# Altium PCB MC5317.PcbDoc
Units mil, origin at the board's own origin, x right, y up, seen from the top; angles counter-clockwise.
Board outline 1095 x 320 mil, 2 copper layers (Top Layer, Bottom Layer); 5 components, 3 nets, 17 pads, 2 vias.
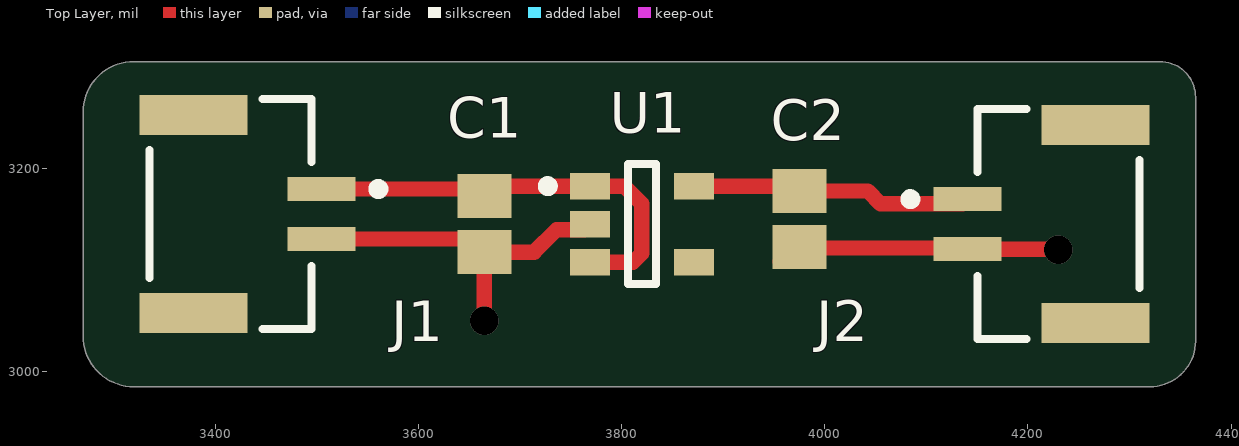
[diagram p0: Top Layer view]
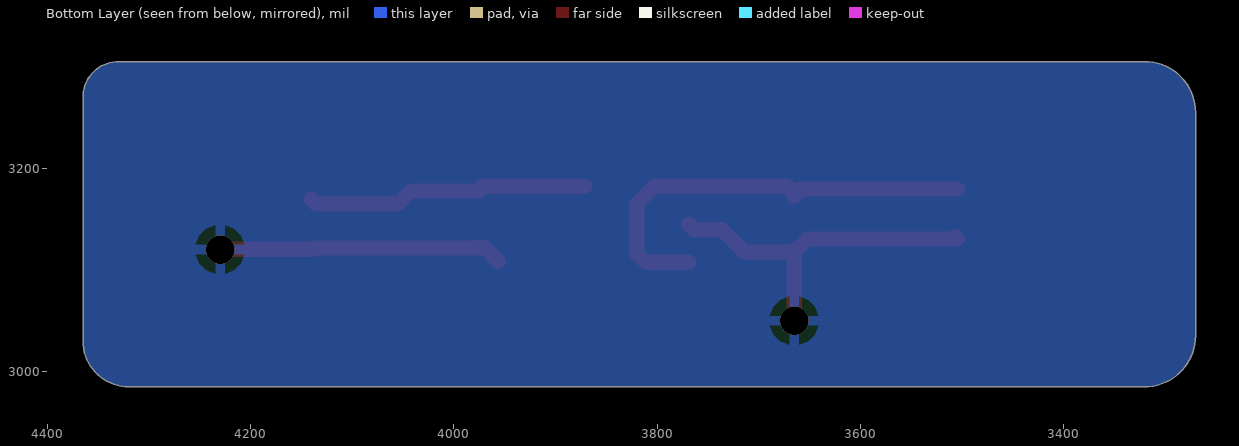
[diagram p1: Bottom Layer view, seen from below]
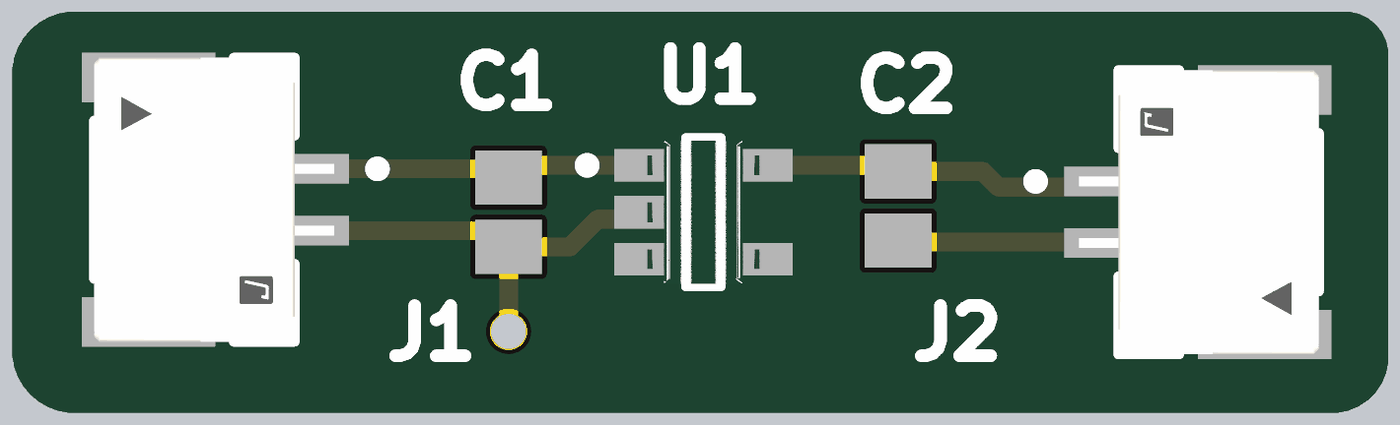
[diagram p2: 3D render of the assembled board from above, using the file's embedded part models]

## Layer stack, top to bottom
Top Solder: solder mask 0.4, Solder Resist, Dk 3.5
Top Layer: signal copper 1.4
Dielectric 1: dielectric 12.6, FR-4, Dk 4.8
Bottom Layer: signal copper 1.4
Bottom Solder: solder mask 0.4, Solder Resist, Dk 3.5

## Board outline
3270,3035 3270,3255 cw(c3320,3255) 3320,3305 4330,3305 cw(c4330,3270) 4365,3270 4365,3030 cw(c4320,3030) 4320,2985 3320,2985 cw(c3320,3035)

## Design rules (kind name [scope] priority, off if disabled: settings)
Clearance [All] p1: gap=10 ignorepadtopadclearanceinfootprint=FALSE except(0: Arc-Hole Track-Hole SMDPad-Hole THPad-Hole Via-Hole Fill-Hole Poly-Hole Region-Hole Text-Hole)
PolygonConnect [All] p1: connectstyle=Relief reliefconductorwidth=10 reliefentries=4 polygonreliefangle="90 Angle" airgapwidth=10
RoutingVias [All] p1: holewidth=28 width=50 viastyle="Through Hole" minholewidth=28 minwidth=50 maxholewidth=28 maxwidth=50
SolderMaskExpansion [All] p1: expansion=4 istentingtop=FALSE
Width [All] p1: maxlimit=15 minlimit=10 preferedwidth=13
30 further rules are at their usual default settings.

## Components (designator, comment, footprint, x,y, rotation, side; value= is the part's Value field where it differs from the comment)
C1 "1uf" CAPC2013X140X50LL20T25 3665,3145 r90 top
C2 "1uf" CAPC2013X140X50LL20T25 3975,3150 r270 top
J1 "SM02B-GHS-TB(LF)(SN)" FP-SM02B-GHS-TB_LF_SN-MFG#1 3415,3155 r270 top
J2 "SM02B-GHS-TB(LF)(SN)" FP-SM02B-GHS-TB_LF_SN-MFG#2 4230,3145 r270 top
U1 "MIC5317-3.3YM5-TR" FP-SOT23-5LD-PL-1-MFG 3820,3145 r0 top

## Footprints (in the part's own frame and the unit in brackets; to place one, negate y for a bottom-side part, rotate by r counter-clockwise, add the part's x,y. Pads: shape width x height; smd on the part's side, far side on the other; paste and mask are expansions set on the pad)
CAPC2013X140X50LL20T25 [mm] "Chip Capacitor, 2-Leads, Body 2.00x1.25mm, IPC High Density"
  rect 1.1x1.35 smd: 1(-0.7,0) 2(0.7,0)
  body extent -1.1,-0.72 1.1,0.72, height 1.4
FP-SM02B-GHS-TB_LF_SN-MFG#1 [mm]
  rect 0.6x1.7 smd paste+0 mask+0: 1(-0.625,2.275) 2(0.625,2.275)
  rect 1x2.7 smd paste+0 mask+0: 3(-2.475,-0.925) 4(2.475,-0.925)
  silkscreen extent -2.88,-2.02 2.88,3.83, body extent -3.08,-2.37 3.08,3.22, height 0.25
FP-SM02B-GHS-TB_LF_SN-MFG#2 [mm]
  rect 0.6x1.7 smd paste+0 mask+0: 1(-0.625,-2.275) 2(0.625,-2.275)
  rect 1x2.7 smd paste+0 mask+0: 3(-2.475,0.925) 4(2.475,0.925)
  silkscreen extent -2.88,-3.82 2.88,2.02, body extent -2.88,-2.83 2.88,2.02, height 4.35
FP-SOT23-5LD-PL-1-MFG [mm]
  rect 1x0.66 smd paste+0 mask+0: 1(-1.3,0.95) 2(-1.3,0) 3(-1.3,-0.95) 4(1.3,-0.95) 5(1.3,0.95)
  silkscreen extent -2.47,-1.5 0.35,1.5, body extent -1.9,-1.6 1.9,1.6, height 0.25

## Part data
C1 C2: library part CMP-2007-03234-1, Manufacturer=Kemet, Part Number=C0805C105K3RACTU
J1 J2: library part CMP-2000-07076-2, "CONN HEADER SMD R/A 2POS 1.25MM", Color=Natural, Current Rating=1A, Package Quantity=2500, Voltage Rating=50V, Connector Type="Outer Shroud Contact", Contact Material=Bronze, Contact Plating=Tin, Contact Type="Male Pin", Fastening Type=Latch, Housing Color=Natural, Housing Material=Nylon, Lead Free="Lead Free", Mount="Surface Mount", Number of Contacts=2, Number of Positions=2, Number of Rows=1, Orientation="Right Angle", Packaging="Tape and Reel", Pitch=0.049inch, Series=GH, Termination=Solder
U1: library part CMP-06324-000116-1, "IC REG LINEAR 3.3V 150MA SOT23-5", Case/Package=SOT-23-5, Dropout Voltage=155mV, Max Input Voltage=6V, Max Operating Temperature=125°C, Min Current Limit=200mA, Min Input Voltage=2.5V, Min Operating Temperature=-40°C, Output Current=150mA, Output Voltage=3.3V, Package Quantity=3000, Power Supply Rejection Ratio (PSRR)=70dB, Mount="Surface Mount", Number of Outputs=1, Number of Regulators=1, Packaging="Tape and Reel", RoHS Compliant=No

## Via types
v1: diameter 28, hole 28, Top Layer to Bottom Layer, 2 vias

## Nets (pads, with @x,y where several pads share a name; then routed paths per layer and width w, separated by ;. In a path a pad name is that pad's centre, name@x,y a point inside that pad or via, vN(x,y) a via of type N, cw(c..) or ccw(c..) an arc to the next point about the centre after c; other vN are vias at no path point)
+3.3V: C2.1 J2.1 U1.5 | length 279.1
  Top Layer w15: U1.5 3970.16,3182.4 cw(c3970.16,3177.56) C2.1 4042.44,3177.56 4055,3165 4135.83,3165 J2.1
+5V: C1.2 J1.1 U1.1 U1.3 | length 434.6
  Top Layer w15: J1.1 3657.95,3179.61 C1.2 cw(c3674.84,3172.56) 3674.84,3182.4 U1.1 3802.6,3182.4 3820,3165 3820,3116.39 3811.21,3107.6 U1.3
GND: C1.1 C2.2 J1.2 J2.2 U1.2 | length 637.7
  Top Layer w15: J1.2@3506.87,3132.7 J1.2 3652.05,3130.39 C1.1 ; v1@3659.99,3050 v1(3665,3050) C1.1 ; U1.2 3763.33,3139.51 3736.14,3139.51 3714.07,3117.44 C1.1 ; C2.2@3955.93,3108.29 3970.08,3122.44 C2.2 3976.02,3121.42 4139.41,3121.42 4140.63,3120.2 4229.8,3120.2 v1(4230,3120)
pads on no net: J1.3 J1.4 J2.3 J2.4 U1.4

## Polygon pours and split planes (outlines as drawn)
GND on Bottom Layer "GND_L02_P000" (solid, pour order 0): 3270,3035 3270,3255 cw(c3320,3255) 3320,3305 4330,3305 cw(c4330,3270) 4365,3270 4365,3030 cw(c4320,3030) 4320,2985 3320,2985 cw(c3320,3035)

## Silkscreen, mask and mechanical layers (free items; w line width, h text height)
Mechanical 1:
  lines w5: 3270,3035 ccw(c3320,3035) 3320,2985 4320,2985 ccw(c4320,3030) 4365,3030 4365,3270 ccw(c4330,3270) 4330,3305 3325,3305 3320,3305 ccw(c3320,3255) 3270,3255 3270,3035